# EAGLE board laser (EAGLE 7.3.0)
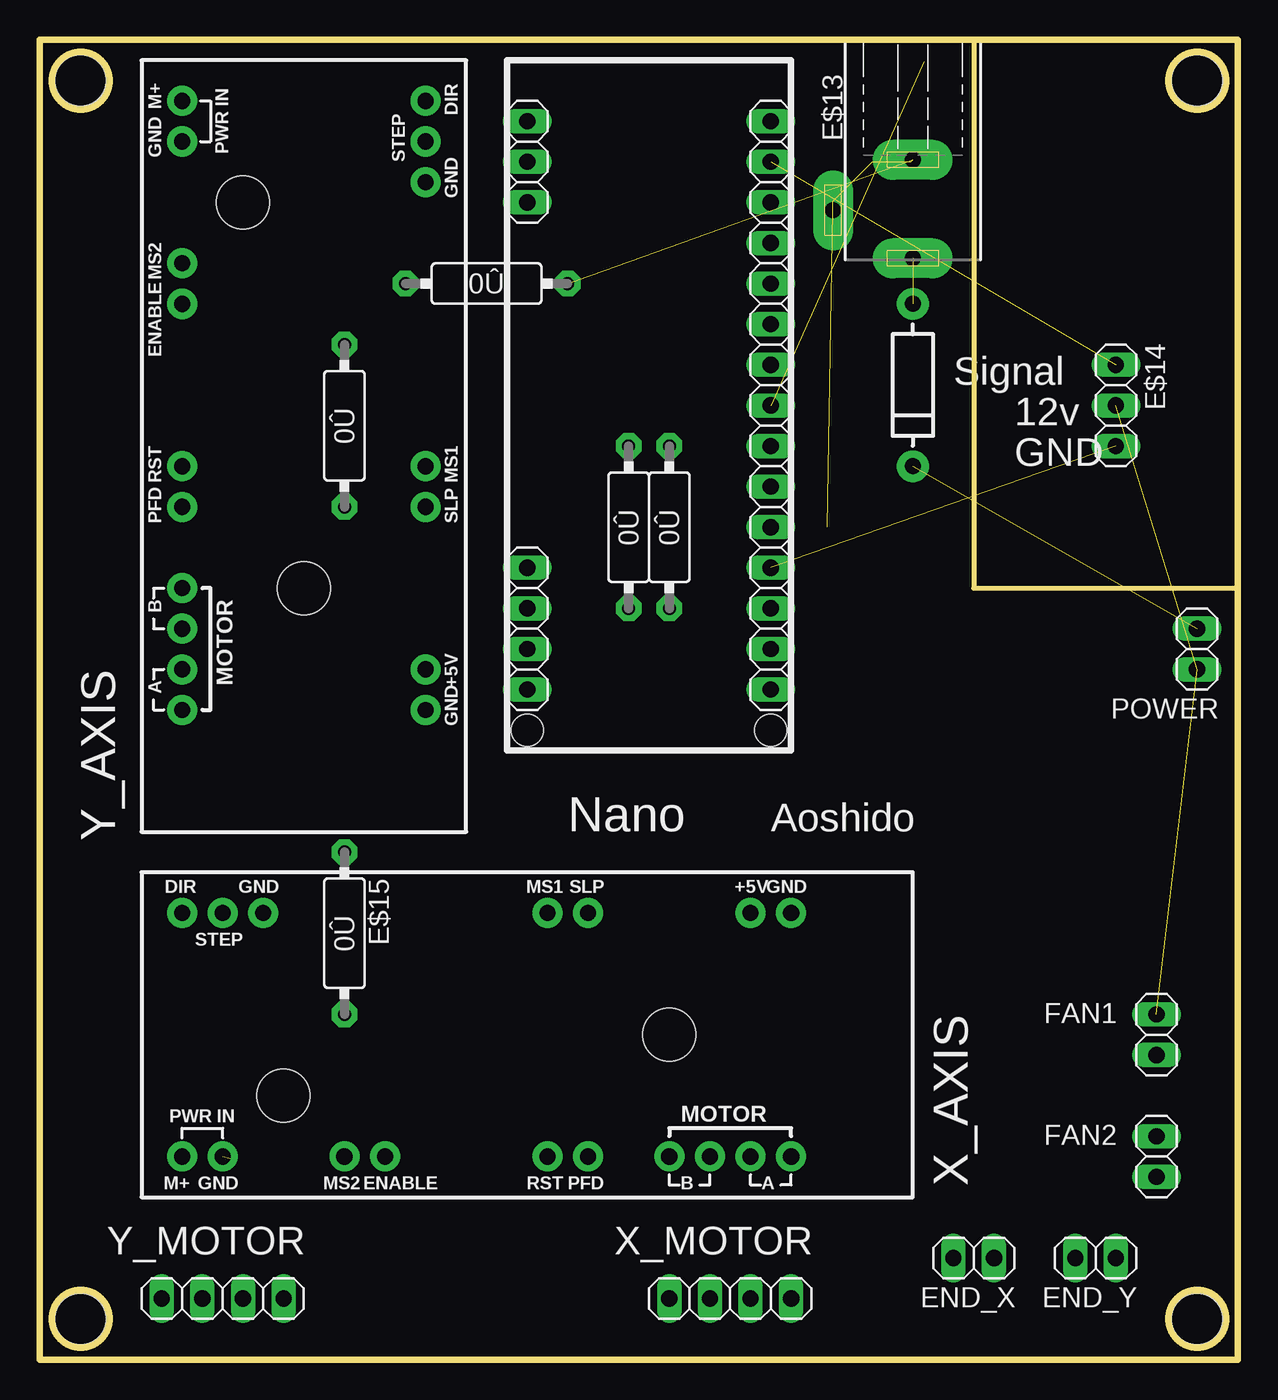
[diagram p0: board, top side]
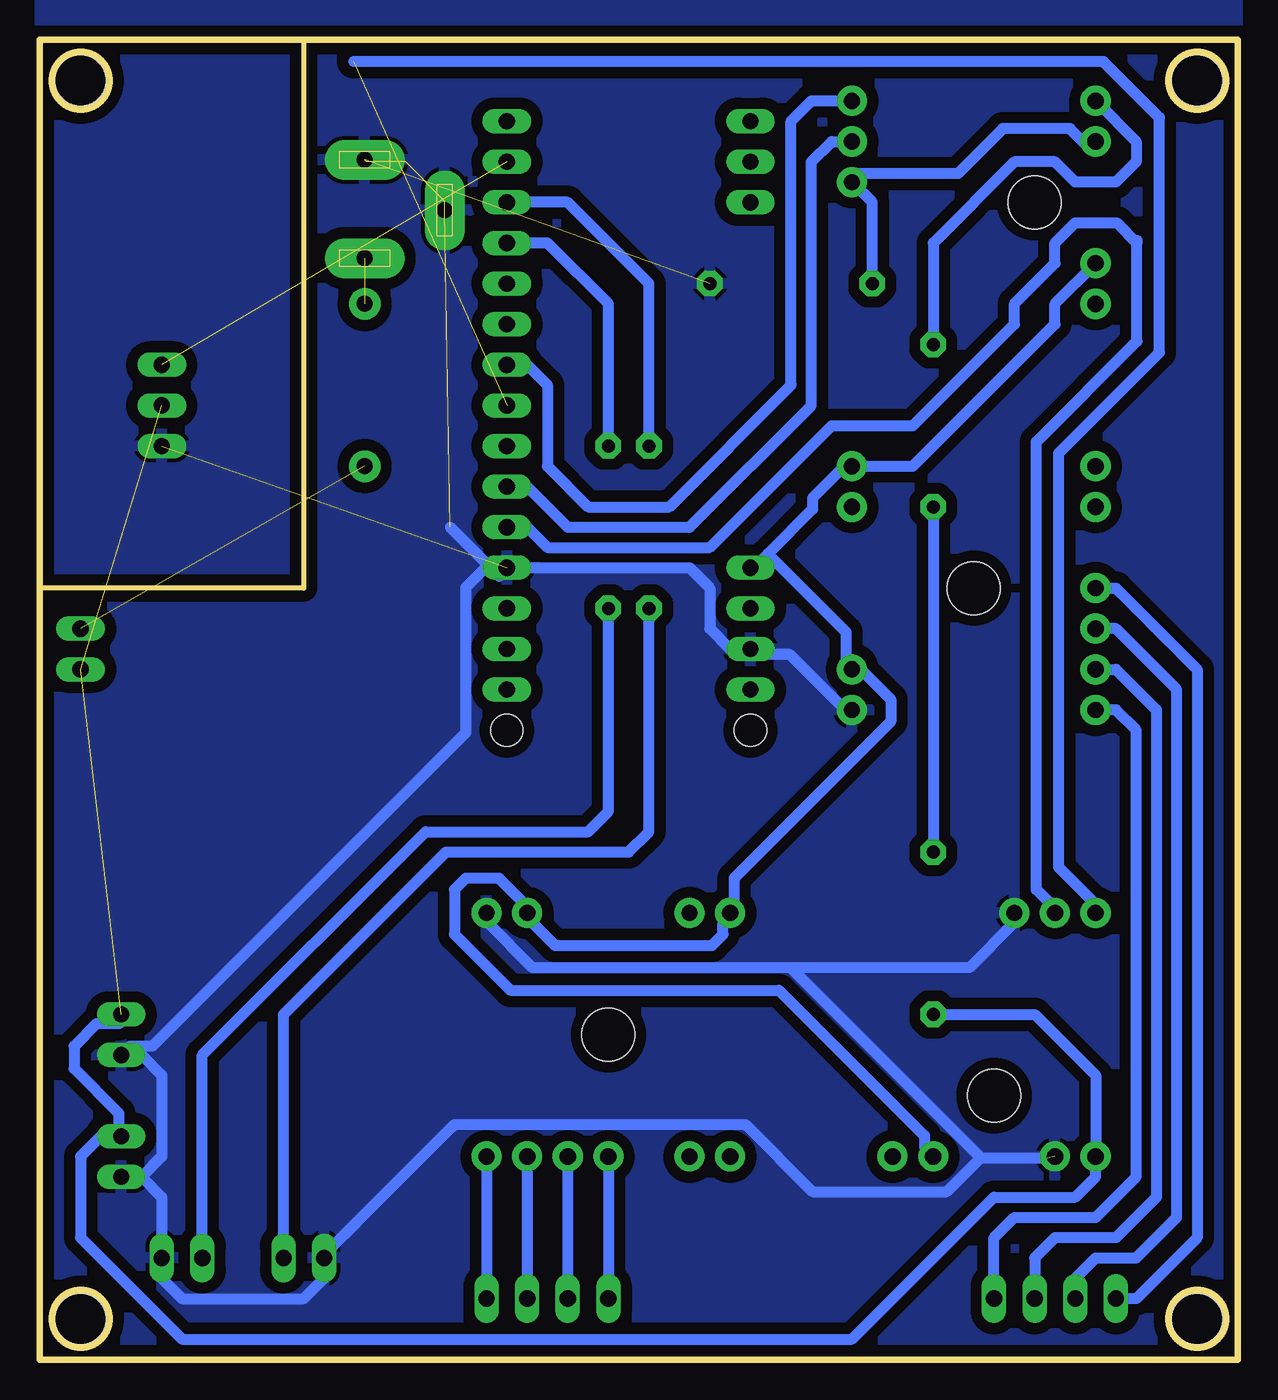
[diagram p1: board, bottom side, seen from below]

Size 74.93 x 82.55 mm. Coordinates in mm from the lower left corner, seen from the top.
Outline: 58.42,82.55 58.42,48.26 74.93,48.26
Outline: 0,0 74.93,0 74.93,82.55 0,82.55 0,0
Outline: circle at 2.54,2.54 radius 1.8
Outline: circle at 72.39,2.54 radius 1.8
Outline: circle at 72.39,80.01 radius 1.8
Outline: circle at 2.54,80.01 radius 1.8
Copper layers (1*16): Top 0.035mm / dielectric 1.5mm / Bottom 0.035mm
Design rules "default *": minimum track width 0.7mm, minimum drill 0.7mm, track to track 0.7mm, track to pad 0.7mm, pad to pad 0.7mm, via to via 0.7mm, smd to smd 8mil, copper to edge 0.7mm, drill to drill 0.7mm, minimum pad ring 10mil, minimum via ring 8mil, stop-mask expansion 4mil, vias tented up to drill 0mil, thermal gap 10mil
Holes 2 mm at 30.48,39.37 45.72,39.37
Holes 3.2 mm at 2.54,80.01 72.39,80.01 72.39,2.54 2.54,2.54 2.54,2.54

## Footprints (pad centres in the part's own frame; a part is rotated, then mirrored left to right if it is on the bottom)
1X03 = drill 1.016 long: 1 -2.54,0; 2 0,0; 3 2.54,0
1X04 = drill 1.016 long: 1 -3.81,0; 2 -1.27,0; 3 1.27,0; 4 3.81,0
1X15 = drill 1.016 long: 1 -17.78,0; 2 -15.24,0; 3 -12.7,0; 4 -10.16,0; 5 -7.62,0; 6 -5.08,0; 7 -2.54,0; 8 0,0; 9 2.54,0; 10 5.08,0; 11 7.62,0; 12 10.16,0; 13 12.7,0; 14 15.24,0; 15 17.78,0
DIODE-1N4001 = drill 1 pad 1.981: A -5.08,0; C 5.08,0
0R/10 = drill 0.813 pad 1.6 octagon: 1 -5.08,0; 2 5.08,0
733980-62 = drill 1 pad 2.5 long: 1 0,8.57; 2 0,2.42; 3 5,5.57
1X02 = drill 1.016 long: 1 -1.27,0; 2 1.27,0
EASYDRIVER_V44 = drill 1.016 pad 1.88: A1 -16.51,7.62; A2 -13.97,7.62; B1 -8.89,7.62; B2 -11.43,7.62; DIR 21.59,-7.62; ENABLE 8.89,7.62; GND1 19.05,7.62; GND2 16.51,-7.62; GND3 -16.51,-7.62; M+ 21.59,7.62; MS1 -1.27,-7.62; MS2 11.43,7.62; P$11 -13.97,-7.62; PFD -3.81,7.62; RST -1.27,7.62; SLEEP -3.81,-7.62; STEP 19.05,-7.62 | hole 3.302: 15.24,3.81; -8.89,0

## Placement (x,y rotation side)
E$2  [1X03]  30.48,74.93 90 top
E$3  [1X04]  30.48,45.72 90 top
E$5  [1X15]  45.72,59.69 270 top
E$8  1N4001  [DIODE-1N4001]  54.61,60.96 270 top
E$10  [0R/10]  36.83,52.07 90 top
E$11  [0R/10]  39.37,52.07 90 top
E$12  [0R/10]  27.94,67.31 180 top
E$13  [733980-62]  54.61,77.47 180 top
E$14  [1X03]  67.31,59.69 270 top
E$15  [0R/10]  19.05,26.67 270 top
E$16  [0R/10]  19.05,58.42 270 top
END_X  [1X02]  58.42,6.35 180 top
END_Y  [1X02]  66.04,6.35 0 top
FAN1  [1X02]  69.85,20.32 90 top
FAN2  [1X02]  69.85,12.7 90 top
POWER  [1X02]  72.39,44.45 90 top
X_AXIS  [EASYDRIVER_V44]  30.48,20.32 180 top
X_MOTOR  [1X04]  43.18,3.81 180 top
Y_AXIS  [EASYDRIVER_V44]  16.51,57.15 90 top
Y_MOTOR  [1X04]  11.43,3.81 180 top

## Library data of the parts
E$2 E$3 E$5 E$14 END_X END_Y FAN1 FAN2 POWER X_MOTOR Y_MOTOR = pinhead
E$8 = SparkFun-DiscreteSemi
E$10-E$12 E$15 E$16 = jumper
E$13 = con-conrad
X_AXIS Y_AXIS = EasyDriver

## Nets
5V: E$3.4 X_AXIS.MS1 X_AXIS.MS2 X_AXIS.P$11 Y_AXIS.MS1 Y_AXIS.MS2 Y_AXIS.P$11
12V: E$14.2 E$15.2 FAN1.2 FAN2.2 POWER.1 X_AXIS.M+
GND: E$3.2 E$5.12 E$12.1 E$13.2 E$13.3 E$14.3 END_X.2 END_Y.2 FAN1.1 FAN2.1 X_AXIS.GND1 X_AXIS.GND2 X_AXIS.GND3 Y_AXIS.GND3
S$1: E$5.10 Y_AXIS.STEP
S$2: E$5.11 X_AXIS.STEP
S$3: E$5.8 X_AXIS.DIR
S$4: E$5.7 Y_AXIS.DIR
S$6: E$5.2 E$14.1
S$7: Y_AXIS.B1 Y_MOTOR.4
S$8: Y_AXIS.B2 Y_MOTOR.3
S$9: Y_AXIS.A2 Y_MOTOR.2
S$10: Y_AXIS.A1 Y_MOTOR.1
S$11: X_AXIS.B1 X_MOTOR.4
S$12: X_AXIS.B2 X_MOTOR.3
S$13: X_AXIS.A2 X_MOTOR.2
S$14: X_AXIS.A1 X_MOTOR.1
S$15: E$5.4 E$11.2
S$17: E$5.3 E$10.2
S$19: E$8.A E$13.1
S$22: E$8.C POWER.2
S$23: E$10.1 END_X.1
S$24: E$11.1 END_Y.1
S$25: E$12.2 Y_AXIS.GND1 Y_AXIS.GND2
S$26: E$15.1 E$16.2
S$27: E$16.1 Y_AXIS.M+

## Tracks (layer width: path | path; a pad name or v marks a point on that pad's centre or on a via)
5V
  Bottom 0.7: X_AXIS.MS2 19.6,13.3 19.6,14 28.7,23.1 45.5,23.1 49,26.6 49,29.4 48.3,30.1 46.2,30.1 44.1,28 X_AXIS.P$11 44.1,27.3 42.7,25.9 32.9,25.9 32.2,26.6 32.2,27.3 X_AXIS.MS1 31.5,28 31.5,30.1 21.7,39.9 21.7,41.3 23.8,43.4 Y_AXIS.P$11 24.5,43.4 24.5,45.5 29.4,50.4 | 29.4,50.4 26.6,53.2 26.6,53.9 24.5,56 Y_AXIS.MS1 20.32,55.88 11.43,64.77 11.43,66.04 Y_AXIS.MS2 | 29.4,50.4 30.1,49.7 E$3.4
12V  (2 unrouted)
  Bottom 0.7: FAN1.2 70,21 71.4,21 72.8,19.6 72.8,18.2 70,15.4 70,14 FAN2.2 71.12,13.97 72.39,12.7 72.39,7.62 66.04,1.27 24.13,1.27 15.24,10.16 10.16,10.16 8.89,11.43 X_AXIS.M+ 8.89,17.78 12.7,21.59 E$15.2
GND  (8 unrouted)
  Bottom 0.7: Y_AXIS.GND3 24.5,40.6 28,44.1 30.1,44.1 E$3.2 31.75,44.45 33.02,45.72 33.02,48.26 34.29,49.53 E$5.12 | 46.9,49.7 46.2,49 E$5.12 | 46.9,49.7 49.27,52.07 | 46.9,49.7 48.3,48.3 48.3,39.2 67.9,19.6 69.3,19.6 FAN1.1 68.58,19.05 67.31,17.78 67.31,12.7 68.58,11.43 | 46.9,49.7 E$5.12 | X_AXIS.GND3 46.9,27.3 44.1,24.5 27.94,24.5 | 27.94,24.5 16.8,24.5 14,27.3 X_AXIS.GND2 | FAN2.1 68.58,11.43 | 68.58,11.43 67.31,10.16 END_Y.2 67.31,5.08 66.04,3.81 58.42,3.81 57.15,5.08 END_X.2 56.7,7 49,14.7 30.8,14.7 26.6,10.5 18.2,10.5 16.1,12.6 16.04,12.6 | 11.9,12.6 16.04,12.6 | 16.04,12.6 27.94,24.5
  pour Bottom: 0,0 74.93,0 74.93,86.36 1.27,85.09
S$1
  Bottom 0.7: E$5.10 44.45,54.61 41.91,52.07 34.29,52.07 26.67,59.69 26.67,74.93 25.4,76.2 Y_AXIS.STEP
S$2
  Bottom 0.7: 6.3,69.85 6.3,63.7 12.6,57.4 12.6,29.4 11.2,28 X_AXIS.STEP | 6.3,69.85 6.3,70 | E$5.11 45.5,52.5 44.88,52.5 43.18,50.8 33.02,50.8 25.4,58.42 20.32,58.42 13.97,64.77 13.97,66.04 11.43,68.58 11.43,69.85 10.16,71.12 7.57,71.12 6.3,69.85
S$3  (1 unrouted)
  Bottom 0.7: 55.3,81.2 8.4,81.2 4.9,77.7 4.9,63 11.2,56.7 11.2,30.8 8.4,28 X_AXIS.DIR
S$4
  Bottom 0.7: E$5.7 44.45,62.23 43.18,60.96 43.18,55.88 40.64,53.34 35.56,53.34 27.94,60.96 27.94,77.47 26.67,78.74 Y_AXIS.DIR
S$6  (1 unrouted)
S$7
  Bottom 0.7: Y_AXIS.B1 7.62,48.26 2.54,43.18 2.54,7.62 6.35,3.81 Y_MOTOR.4
S$8
  Bottom 0.7: Y_MOTOR.3 10.16,5.08 8.89,6.35 6.35,6.35 3.81,8.89 3.81,41.91 7.62,45.72 Y_AXIS.B2
S$9
  Bottom 0.7: Y_AXIS.A2 7.62,43.18 5.08,40.64 5.08,10.16 7.62,7.62 11.43,7.62 12.7,6.35 Y_MOTOR.2
S$10
  Bottom 0.7: Y_MOTOR.1 15.24,7.62 13.97,8.89 8.89,8.89 6.35,11.43 6.35,39.37 7.62,40.64 Y_AXIS.A1
S$11
  Bottom 0.7: X_AXIS.B1 X_MOTOR.4
S$12
  Bottom 0.7: X_AXIS.B2 X_MOTOR.3
S$13
  Bottom 0.7: X_AXIS.A2 X_MOTOR.2
S$14
  Bottom 0.7: X_AXIS.A1 X_MOTOR.1
S$15
  Bottom 0.7: E$11.2 39.37,66.04 43.18,69.85 E$5.4
S$17
  Bottom 0.7: E$10.2 36.83,67.31 41.91,72.39 E$5.3
S$19  (1 unrouted)
S$22  (1 unrouted)
S$23
  Bottom 0.7: END_X.1 59.69,21.59 49.53,31.75 38.1,31.75 36.83,33.02 E$10.1
S$24
  Bottom 0.7: END_Y.1 64.77,19.05 50.8,33.02 40.64,33.02 39.37,34.29 E$11.1
S$25
  Bottom 0.7: Y_AXIS.GND1 9.1,75.6 10.5,77 14.7,77 17.5,74.2 23.8,74.2 Y_AXIS.GND2 22.86,72.39 E$12.2
S$26
  Bottom 0.7: E$16.2 E$15.1
S$27
  Bottom 0.7: Y_AXIS.M+ 6.35,76.2 6.35,74.93 7.62,73.66 10.16,73.66 11.43,74.93 13.97,74.93 19.05,69.85 E$16.1
S$29
  pour Bottom: 0,87.63 74.93,87.63 74.93,0 0,0

## Text on the board
tPlace: Nano | Aoshido
tOrigins: x | x | Don't Drill | x | x
tNames: Signal | 12v | GND